# Altium PCB OSSI-1 OBC.PcbDoc (part 2 of 2)
Units mil, origin at the board's own origin, x right, y up, seen from the top; angles counter-clockwise.
Board outline 3701 x 3701 mil, 2 copper layers (Top, Bottom), stack 61.811 mil thick; 158 components, 161 nets, 616 pads, 177 vias.
Unrouted connection lines stored in the file: 1.
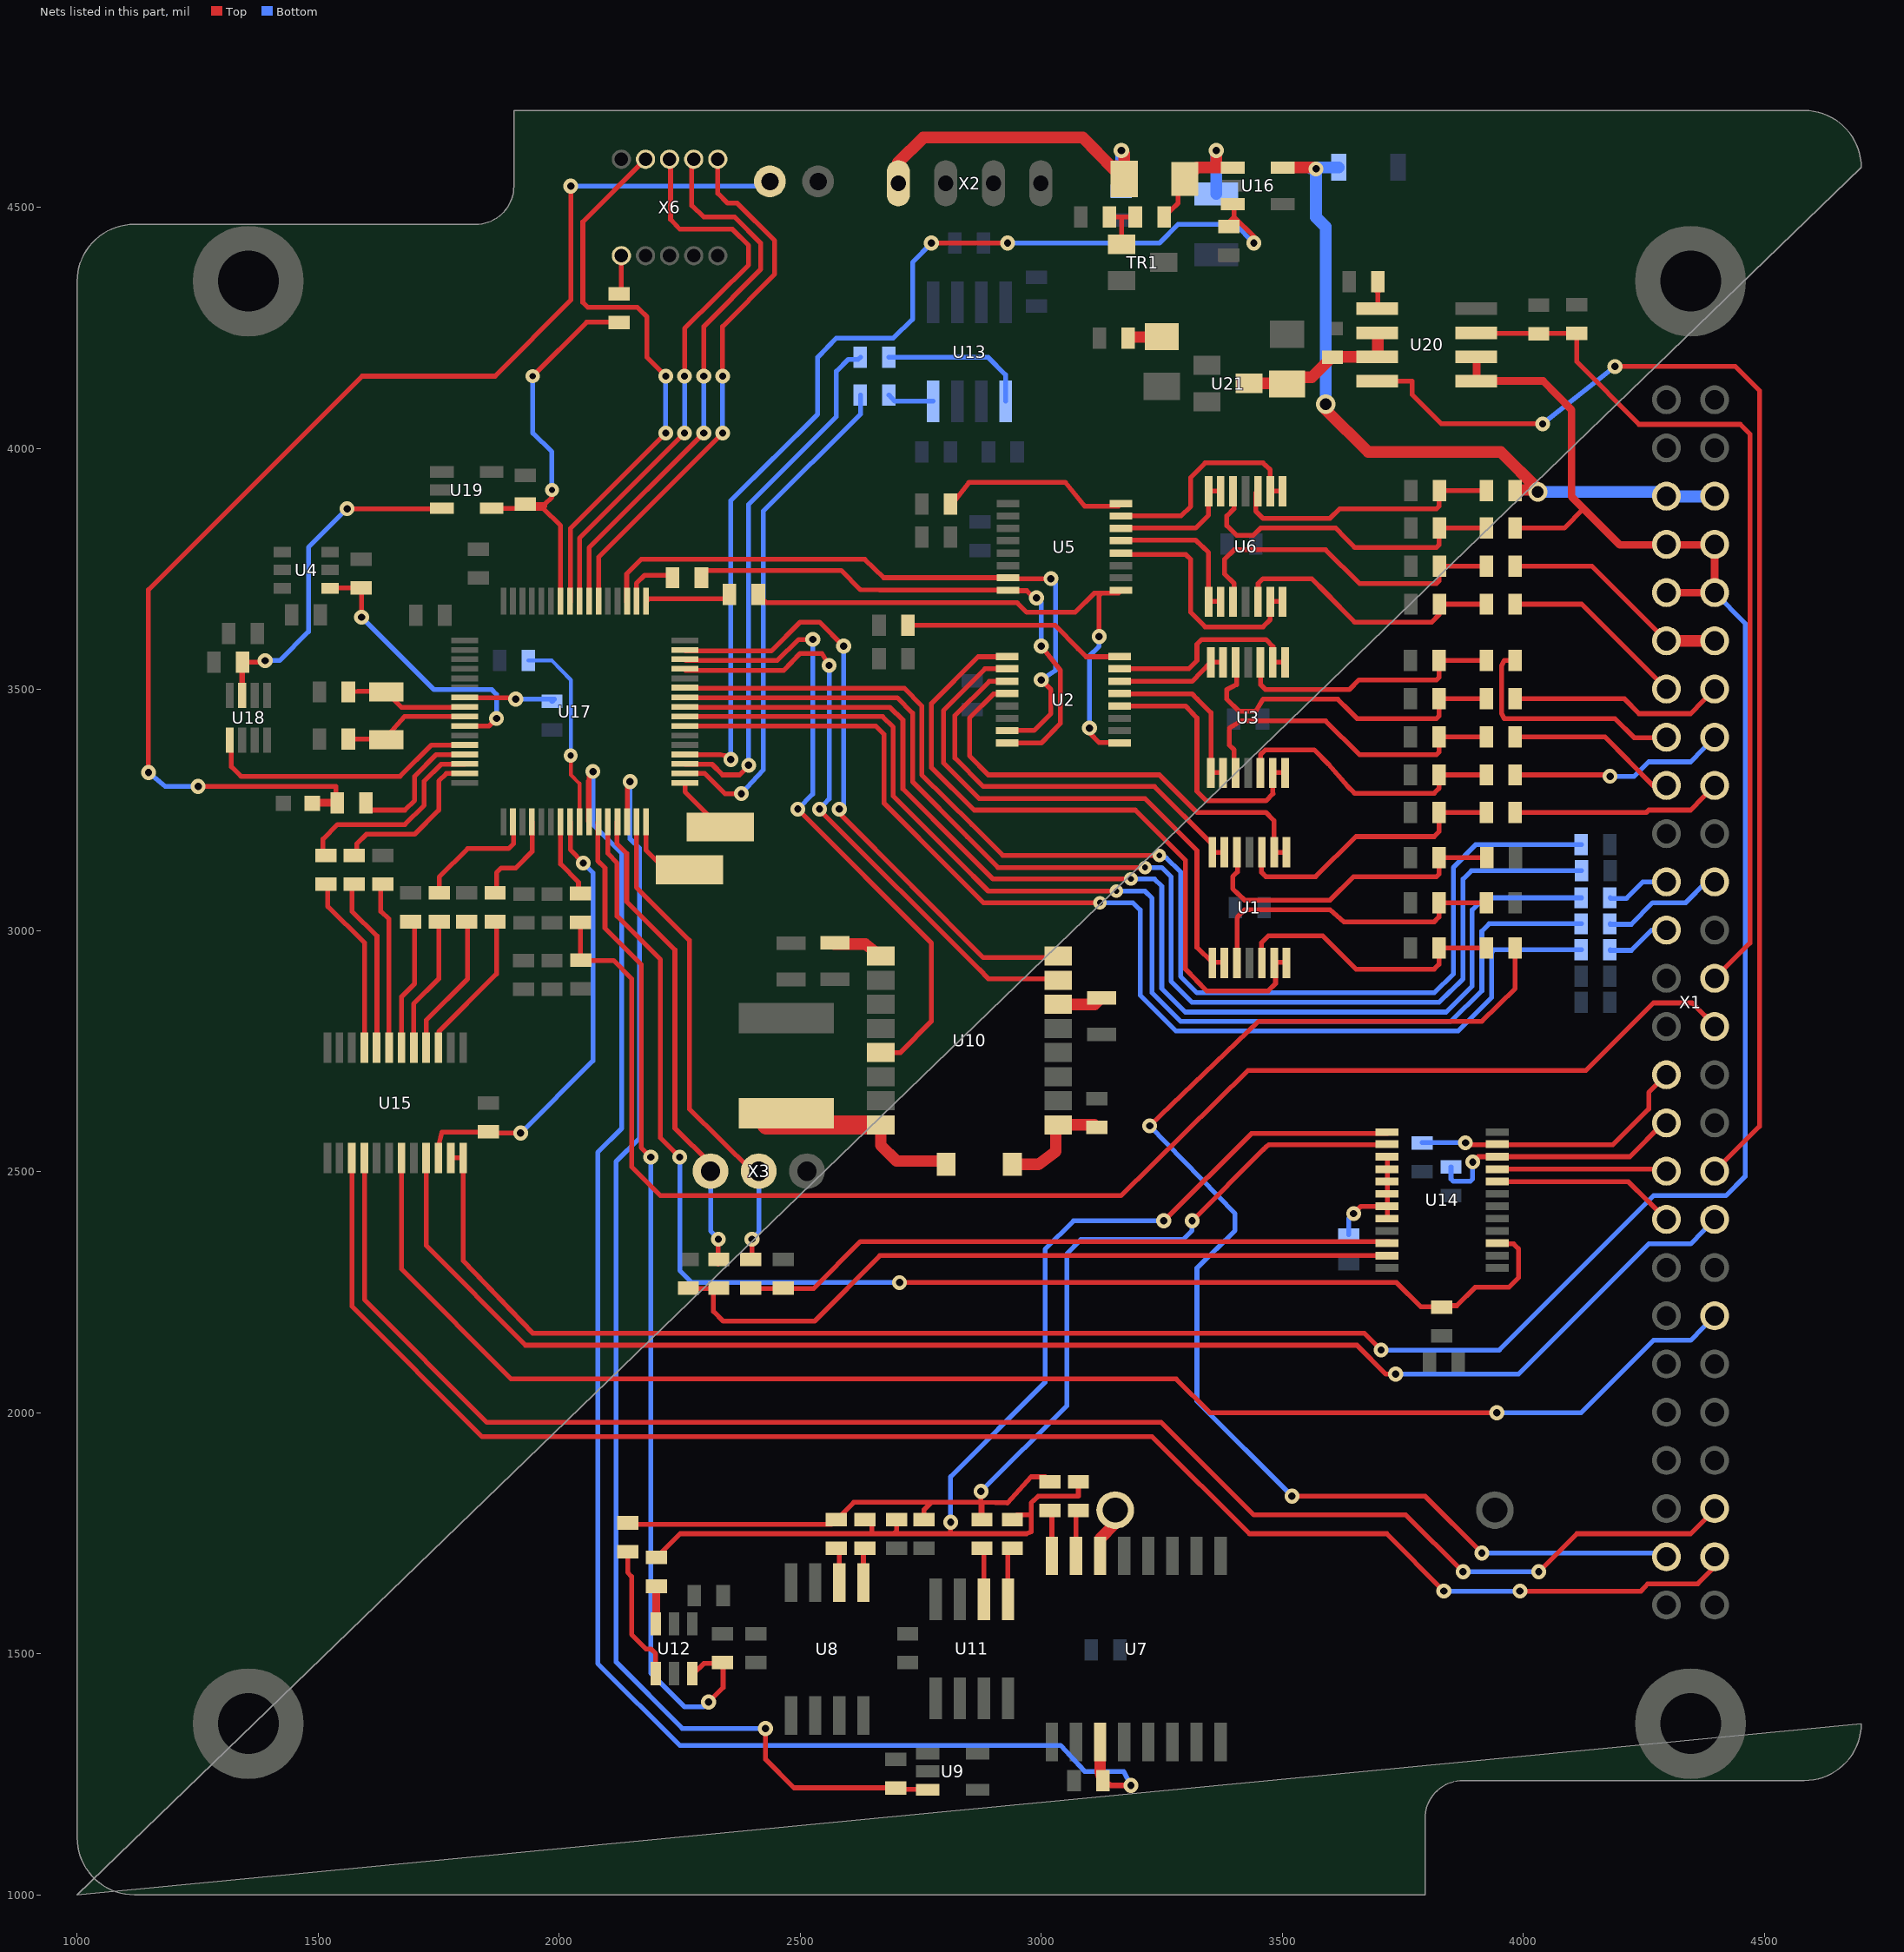
[diagram p2: the nets of this part, all layers, seen from the top]

## Via types
v1: diameter 31/31 (per signal layer), hole 15, Top to Bottom, 101 vias
v2: diameter 36/36 (per signal layer), hole 20, Top to Bottom, 59 vias
v3: diameter 28/28 (per signal layer), hole 12, Top to Bottom, 7 vias
v4: diameter 29/29 (per signal layer), hole 13, Top to Bottom, 6 vias
v5: diameter 40/40 (per signal layer), hole 24, Top to Bottom, 2 vias
v6: diameter 32/32 (per signal layer), hole 16, Top to Bottom, 2 vias

## Nets (pads, with @x,y where several pads share a name; then routed paths per layer and width w, separated by ;. In a path a pad name is that pad's centre, name@x,y a point inside that pad or via, vN(x,y) a via of type N, cw(c..) or ccw(c..) an arc to the next point about the centre after c; other vN are vias at no path point) (continued)
GYRO_SCLK: U10.16 U17.47 | length 1305.1
  Top w10: U17.47@2261,3582 2262,3580 2440,3580 2500,3640 2540,3640 v1(2590,3590) ; v1(2581,3252) 2581,3244 2880,2944 3032,2944 U10.16@3035,2947
  Bottom w10: v1(2581,3252) 2590,3262 v1(2590,3590)
GYRO_SI: U10.15 U17.45 | length 1277.7
  Top w10: U17.45@2261,3542 2262,3540 2466,3540 2500,3575 2545,3575 v1(2560,3550) ; v1(2540,3252) 2540,3250 2871,2920 2890,2900 3012,2900 3020,2897 U10.15@3035,2897
  Bottom w10: v1(2540,3252) 2560,3273 v1(2560,3550)
GYRO_SO: U10.5 U17.46 | length 1335.3
  Top w10: U17.46@2261,3562 2263,3560 2452,3560 2497,3604 2511,3604 v1(2526,3604) ; v1(2495,3252) 2772,2974 2772,2812 2708,2747 U10.5@2667,2747
  Bottom w10: v1(2495,3252) 2526,3283 v1(2526,3604)
I2C_-RST: R48.1 U14.3 U17.28 | length 2913.3
  Top w10: U17.28@2101,3225 2101,3160 2120,3140 2120,3030 2210,2940 2210,2570 v1(2250,2530) ; v1(2706,2270) 3737,2270 3787,2220 3829,2220 3831,2219 R48.1@3830,2222 ; R48.1@3820,2220 R48.1@3830,2222 ; U14.3@3947,2351 3950,2351 3950,2350 3980,2350 3990,2340 3990,2280 3970,2260 3900,2260 3862,2222 R48.1@3830,2222
  Bottom w10: v1(2250,2530) 2250,2295 2275,2270 2610,2270 2669,2270 2708,2270 v1(2706,2270)
I2C_SCL: R64.1 R67.1 U14.22 | length 1370.8
  Top w10: R64.1@2397,2258 2465,2258 2528,2258 2625,2355 3722,2355 U14.22@3718,2351
I2C_SCL_TP: R64.2 U17.31 X3.2 | length 1040.2
  Top w10: U17.31@2160,3225 2160,3090 2270,2980 2270,2630 2400,2501 X3.2@2414,2501 ; R64.2@2397,2317 2400,2311 v1(2400,2360)
  Bottom w10: v1(2400,2360) 2414,2374 X3.2@2414,2501
I2C_SDA: R63.1 R65.1 U14.23 | length 1573.9
  Top w10: R65.1@2268,2258 2279,2258 R63.1@2320,2258 ; R63.1@2331,2258 R63.1@2320,2258 ; U14.23@3718,2326 2702,2326 2665,2326 2530,2190 2340,2190 2320,2210 2320,2220 R63.1@2320,2258
I2C_SDA_TP: R63.2 U17.29 X3.1 | length 1014.1
  Top w10: U17.29@2121,3225 2120,3225 2120,3180 2140,3160 2140,3060 2240,2960 2240,2590 2314,2517 X3.1@2314,2501 ; v1(2330,2360) 2330,2308 R63.2@2331,2317
  Bottom w10: X3.1@2314,2501 2314,2377 v1(2330,2360)
IO_-OE: R62.1 U15.22 U17.24 | length 968.5
  Top w10: U15.22@1750,2529 1750,2530 1750,2555 1757,2582 1853,2582 1843,2588 1850,2580 v1(1920,2580) ; U17.24@2023,3225 2023,3168 v1(2050,3140)
  Bottom w10: v1(1920,2580) 2070,2730 2070,3120 v1(2050,3140)
LED_-FAULT: R44.1 R46.1 X1.28 | length 3054.4
  Top w10: R44.1@2044,3017 2044,2940 2045,2938 2113,2938 2150,2900 2150,2510 2210,2450 3165,2450 3429,2710 4130,2710 4270,2850 4350,2850 4400,2800 4397,2800 X1.28@4397,2801
LED_-FAULT_IN: R44.2 U17.23 | length 165.7
  Top w10: U17.23@2003,3225 2003,3138 2040,3100 2040,3080 R44.2@2044,3076
LED_OFF: R29.1 X1.23 | length 135.4
  Bottom w10: R29.1@4180,2960 4180,2959 4224,2959 4266,3001 X1.23@4297,3001
LED_OFF_OUT: R29.2 U17.39 | length 2433.6
  Top w10: U17.39@2261,3424 2652,3424 2657,3424 2674,3407 2674,3264 2821,3117 2880,3058 v3(3122,3058)
  Bottom w10: v3(3122,3058) 3186,3058 3190,3058 3205,3043 3205,2866 3279,2792 3865,2792 3934,2861 3934,2954 3939,2960 R29.2@4121,2960
LED_SCL: U14.9 X1.33 | length 351.7
  Top w10: U14.9@3947,2505 4293,2505 X1.33@4297,2501
LED_SDA: U14.8 X1.35 | length 382
  Top w10: U14.8@3947,2479 4218,2479 X1.35@4297,2401
MUX_A0: R73.2 U2.1 U5.1 | length 1159.5
  Top w10: R73.2@2413,3697 2430,3680 2950,3680 2970,3660 3070,3660 3110,3700 3126,3700 ; v1(3100,3420) 3100,3410 3120,3390 3162,3390 U2.1@3163,3389 ; v1(3120,3610) 3120,3695 3126,3700 ; U5.1@3165,3706 3160,3700 3126,3700
  Bottom w10: v1(3100,3420) 3100,3570 3120,3590 v1(3120,3610)
MUX_A1: R72.2 U2.16 U5.16 | length 1133.8
  Top w10: R72.2@2295,3732 2295,3737 2305,3747 2585,3747 2625,3707 2665,3706 2668,3706 U5.16@2931,3706 2932,3705 2970,3705 2985,3690 v1(2990,3690) ; U2.16@2929,3389 3000,3389 3040,3430 3040,3540 v1(3000,3590)
  Bottom w10: v1(2990,3690) 3000,3680 v1(3000,3590)
MUX_A2: U2.15 U5.15 U17.51 | length 1381.7
  Top w10: U17.51@2141,3682 2140,3682 2140,3740 2170,3770 2634,3770 2673,3732 U5.15@2931,3732 2933,3730 v1(3020,3730) ; U2.15@2929,3415 2985,3415 3020,3450 3020,3500 v1(3000,3520)
  Bottom w10: v1(3000,3520) 3030,3540 3030,3720 v1(3020,3730)
N$1: U17.12 U18.1 | length 575.6
  Top w10: U18.1@1316,3395 1320,3390 1320,3340 1340,3320 1670,3320 1735,3385 U17.12@1804,3385
N$2: R16.2 R17.1 U6.3 | length 572.2
  Top w10: U6.3@3449,3912 3445,3908 3445,3870 3460,3855 3599,3855 3619,3875 3820,3875 3825,3880 3825,3913 R17.1@3924,3913
N$3: U5.7 U6.1 U6.2 | length 465.2
  Top w10: U5.7@3165,3860 3166,3860 3290,3860 3310,3880 3310,3940 3340,3970 3460,3970 3475,3956 3475,3912 U6.1@3500,3912
N$4: R45.1 R47.2 TR1.1 | length 110.4
  Top w10: R45.1@3141,4480 3166,4480 ; TR1.1@3167,4424 3167,4479 3166,4480 ; R47.2@3195,4480 3166,4480
N$5: C32.1 Q1.1 U17.8 | length 256
  Top w10: C32.1@1562,3495 1583,3496 1641,3496 1673,3463 U17.8@1804,3463
N$6: C31.1 Q1.2 U17.9 | length 266.8
  Top w10: C31.1@1562,3397 1583,3397 1641,3397 1641,3400 1640,3400 1679,3444 U17.9@1804,3444
N$7: R19.2 U7.15 | length 100
  Top w10: U7.15@3072,1703 3072,1798 R19.2@3077,1798
N$8: U5.6 U6.6 U6.7 | length 268.4
  Top w10: U5.6@3165,3834 3167,3835 3320,3835 3347,3862 3347,3912 U6.6@3372,3912
N$9: U5.5 U6.8 U6.9 | length 318.7
  Top w10: U5.5@3165,3809 3167,3810 3320,3810 3347,3784 3347,3683 U6.9@3372,3683
N$10: R74.2 U20.5 | length 77.2
  Top w10: R74.2@3697,4346 3697,4324 3701,4327 3695,4327 3698,4330 U20.5@3698,4290
N$11: U5.4 U6.13 U6.14 | length 507
  Top w10: U5.4@3165,3783 3168,3780 3300,3780 3310,3770 3310,3660 3340,3630 3460,3630 3475,3645 3475,3683 U6.14@3500,3683
N$12: U2.7 U3.1 U3.2 | length 428.4
  Top w10: U2.7@3163,3543 3306,3543 3323,3560 3323,3594 3333,3604 3466,3604 3481,3589 3481,3557 3480,3557 U3.1@3506,3557
N$13: C33.1 U17.7 | length 194.3
  Top w10: U17.7@1804,3483 1908,3483 v1(1910,3480)
  Bottom w10: v1(1910,3480) 1990,3480 1986,3476 C33.1@1985,3476
N$14: R39.2 U13.1 | length 311.9
  Bottom w10: R39.2@2684,4189 2693,4189 2890,4189 2926,4153 U13.1@2926,4098
N$15: R21.2 U7.16 | length 96.4
  Top w10: R21.2@3018,1798 3022,1793 U7.16@3022,1703
N$16: R54.1 U14.15 U14.16 U14.17 U14.18 U14.19 U14.20 | length 252.4
  Top w10: v1(3648,2413) 3663,2428 U14.19@3718,2428 ; U14.20@3718,2403 U14.19@3718,2428 ; U14.15@3718,2531 3718,2505 3718,2479 3718,2454 U14.19@3718,2428
  Bottom w10: R54.1@3638,2369 3638,2403 v1(3648,2413)
N$17: U17.57 X6.7 | length 1185.4
  Top w10: U17.57@2023,3682 2023,3834 v1(2221,4032) ; X6.7@2179,4600 2049,4470 2049,4303 2059,4293 2162,4293 2167,4288 2182,4273 2182,4189 v1(2221,4150)
  Bottom w10: v1(2221,4032) v1(2221,4150)
N$18: U17.56 X6.5 | length 1195.6
  Top w10: U17.56@2042,3682 2042,3814 v1(2260,4032) ; X6.5@2229,4600 2231,4599 2231,4475 2250,4455 2359,4455 2393,4421 2393,4381 2260,4249 v1(2260,4150)
  Bottom w10: v1(2260,4032) v1(2260,4150)
N$19: U17.55 X6.3 | length 1163.8
  Top w10: U17.55@2062,3682 2062,3794 v1(2300,4032) ; X6.3@2279,4600 2275,4596 2275,4504 2300,4480 2364,4480 2418,4426 2418,4372 2300,4253 v1(2300,4150)
  Bottom w10: v1(2300,4032) v1(2300,4150)
N$20: U17.54 X6.1 | length 1129.5
  Top w10: U17.54@2082,3682 2082,3775 v1(2339,4032) ; X6.1@2329,4600 2329,4529 2349,4509 2369,4509 2447,4431 2447,4362 2339,4253 v1(2339,4150)
  Bottom w10: v1(2339,4032) v1(2339,4150)
N$21: U2.6 U3.6 U3.7 | length 231.9
  Top w10: U2.6@3163,3517 3313,3517 3352,3557 U3.6@3378,3557
N$22: R36.2 U13.4 | length 97.7
  Bottom w10: R36.2@2684,4111 2696,4098 U13.4@2776,4098
N$23: R71.1 X6.10 | length 87.4
  Top w10: R71.1@2120,4320 R71.1@2121,4321 ; R71.1@2124,4321 R71.1@2121,4321 ; X6.10@2129,4400 2129,4332 2130,4330 R71.1@2121,4321
N$24: R14.2 R15.1 U6.5 | length 706.3
  Top w10: U6.5@3398,3912 3400,3909 3400,3875 3385,3860 3385,3840 3405,3820 3440,3820 3455,3835 3530,3835 3520,3835 3611,3835 3630,3815 3650,3795 3820,3795 3825,3800 3825,3835 R15.1@3924,3835
N$25: R12.2 R13.1 U6.10 | length 710.2
  Top w10: U6.10@3398,3683 3400,3686 3400,3720 3380,3740 3380,3770 3400,3790 3590,3790 3660,3720 3820,3720 3825,3725 3825,3756 R13.1@3924,3756
N$26: R10.2 R11.1 U6.12 | length 581.3
  Top w10: U6.12@3449,3683 3450,3684 3450,3720 3460,3730 3561,3730 3591,3700 3630,3660 3650,3640 3810,3640 3825,3655 3825,3677 R11.1@3924,3677
N$27: R18.2 U5.8 | length 401.1
  Top w10: R18.2@2812,3885 2815,3885 2850,3930 3050,3930 3090,3880 3160,3880 U5.8@3165,3885
N$28: U2.5 U3.8 U3.9 | length 355.2
  Top w10: U2.5@3163,3491 3313,3491 3323,3481 3352,3452 3352,3328 U3.9@3378,3328
N$29: R9.2 U2.8 | length 467.2
  Top w10: R9.2@2723,3633 3029,3633 3077,3584 3093,3568 U2.8@3163,3568
N$30: U2.4 U3.13 U3.14 | length 566.2
  Top w10: U2.4@3163,3466 3299,3466 3323,3441 3323,3289 3343,3269 3466,3269 3481,3284 3480,3284 3480,3328 U3.14@3506,3328
N$31: U1.1 U1.2 U2.12 | length 955.9
  Top w10: U2.12@2929,3491 2901,3491 2851,3441 2851,3363 2890,3323 3245,3323 3323,3245 3441,3245 3466,3245 3481,3230 3483,3228 3483,3162 U1.1@3508,3162
N$32: R68.2 U17.13 | length 290.2
  Top w10: R68.2@1599,3265 1599,3262 1610,3250 1680,3250 1700,3270 1700,3320 1745,3365 U17.13@1804,3365
N$33: C23.1 U10.1 | length 108.8
  Top w24: C23.1@2572,2974 2572,2973 2570,2972 2620,2972 2635,2972 U10.1@2667,2947
N$34: R24.2 U8.5 | length 71.5
  Top w10: U8.5@2631,1648 2631,1711 R24.2@2634,1719
N$35: R25.2 U8.6 | length 78.4
  Top w10: R25.2@2575,1719 2579,1719 2580,1720 2581,1720 U8.6@2581,1648
N$36: R30.2 U11.5 | length 110.7
  Top w10: U11.5@2931,1612 2931,1710 R30.2@2940,1719
N$37: R70.2 U17.43 | length 2589
  Top w10: U17.43@2261,3503 2716,3503 2752,3466 2752,3323 2856,3220 2920,3156 v3(3245,3156)
  Bottom w10: v3(3245,3156) 3250,3151 3259,3151 3289,3122 3289,2905 3323,2871 3815,2871 3855,2910 3855,3131 3901,3178 R70.2@4121,3178
N$38: R69.2 U17.42 | length 2566.4
  Top w10: U17.42@2261,3483 2701,3483 2733,3451 2733,3309 2846,3195 2910,3131 v3(3215,3131)
  Bottom w10: v3(3215,3131) 3240,3131 3250,3131 3269,3112 3269,2895 3313,2851 3825,2851 3875,2900 3875,3107 3892,3124 R69.2@4121,3124
N$39: R31.2 U11.6 | length 108.4
  Top w10: R31.2@2877,1719 2881,1714 U11.6@2881,1612
N$40: R38.2 U12.6 | length 80.4
  Top w16: U12.6@2201,1561 2201,1640 R38.2@2202,1641
N$41: R41.2 U12.1 | length 284.6
  Top w10: R41.2@2142,1713 2142,1669 2150,1660 2150,1540 2180,1510 2190,1510 2200,1500 2200,1460 2201,1460 U12.1@2201,1459
N$42: R66.2 U17.25 | length 407.3
  Top w8: v4(2024,3363) 2024,3323 2042,3305 U17.25@2042,3225
  Bottom w8: R66.2@1936,3560 1985,3560 2024,3520 v4(2024,3363)
N$43: C27.1 F1.1 X2.1 | length 750.6
  Top w16: F1.1@3155,4585 3157,4583 3166,4583 F1.1@3182,4583
  Top w24: F1.1@3166,4583 3172,4589 v6@3172,4612 ; v6(3166,4618) v6@3172,4612 ; F1.1@3172.01,4559 v6@3172,4612
  Top w25: X2.1@2703,4550 2703,4593 2755,4645 3086,4645 3150,4580 F1.1@3155,4585
  Bottom w24: C27.1@3166,4534 v6(3166,4618)
N$44: U1.8 U1.9 U2.10 | length 1148.3
  Top w10: U2.10@2929,3542.98 2883,3543 2797,3456 2797,3348 2871,3274 3215,3274 3323,3166 3323,2965 3355,2934 U1.9@3380,2934
N$45: U1.13 U1.14 U2.9 | length 1444.8
  Top w10: U2.9@2929,3568 2869,3568 2772,3471 2772,3338 2861,3250 3195,3250 3299,3146 3299,2920 3343,2875 3471,2875 3486,2890 3486,2931 3483,2934 U1.14@3508,2934
N$46: C22.1 U10.14 | length 95.8
  Top w24: U10.14@3035,2847 3111,2847 C22.1@3125,2861
N$47: C1.1 R1.1 U1.12 | length 580.5
  Top w10: U1.12@3457,2934 3457,2975 3461,2979 3471,2989 3584,2989 3653,2920 3815,2920 3825,2930 3825,2964 R1.1@3924,2964
N$48: C2.1 R2.1 U1.10 | length 660.8
  Top w10: U1.10@3406,2934 3406,3024 3407,3028 3422,3043 3599,3043 3628,3018 3815,3018 3825,3028 3825,3058 R2.1@3924,3058
N$49: R53.1 U15.6 | length 275.5
  Top w10: U15.6@1673,2757 1673,2863 1700,2890 1700,3010 R53.1@1692,3018
N$50: R52.1 U15.7 | length 349.3
  Top w10: R52.1@1634,3097 1630,3094 1630,3040 1647,3024 U15.7@1647,2757
N$51: C10.1 R8.1 U3.3 | length 565.5
  Top w10: U3.3@3455,3557 3455,3556 3455,3510 3465,3500 3639,3500 3659,3520 3820,3520 3825,3525 3825,3560 R8.1@3924,3560
N$52: C8.1 R7.1 U3.5 | length 707.7
  Top w10: U3.5@3404,3557 3405,3555 3405,3510 3385,3500 3385,3480 3410,3455 3445,3455 3460,3480 3535,3480 3615,3480 3640,3455 3655,3440 3820,3440 3825,3445 3825,3481 R7.1@3924,3481
N$53: C7.1 R6.1 U3.10 | length 699.4
  Top w10: U3.10@3404,3328 3400,3331 3400,3375 3390,3385 3390,3420 3415,3435 3590,3435 3660,3365 3820,3365 3825,3370 3825,3402 R6.1@3924,3402
N$54: C6.1 R5.1 U3.12 | length 581.5
  Top w10: U3.12@3455,3328 3455,3329 3455,3365 3465,3375 3566,3375 3596,3345 3635,3300 3650,3285 3815,3285 3825,3295 3825,3323 R5.1@3924,3323
N$55: C3.1 R3.1 U1.3 | length 590
  Top w10: U1.3@3457,3162 3457,3121 3461,3117 3466,3112 3569,3112 3653,3195 3815,3195 3825,3205 3825,3245 R3.1@3924,3245
N$56: R51.1 U15.8 | length 364.2
  Top w10: R51.1@1575,3097 1570,3093 1570,3040 1622,2989 U15.8@1622,2757
N$57: R50.1 U15.9 | length 373.4
  Top w10: R50.1@1516,3097 1520,3093 1520,3050 1596,2975 U15.9@1596,2757
N$58: C5.1 R4.1 U1.5 | length 672.6
  Top w10: U1.5@3406,3162 3407,3161 3407,3122 3397,3112 3397,3087 3422,3063 3599,3063 3648,3112 3820,3112 3825,3117 3825,3151 3826,3151 R4.1@3924,3151
N$59: C41.2 R75.1 | length 69.8
  Top w24: R75.1@3181,4229 3183,4231 C41.2@3250,4231
N$60: U17.33 X5.1 | length 121.2
  Top w10: U17.33@2261,3306 2261,3288 X5.1@2334,3215
N$61: U17.32 X4.1 | length 165
  Top w10: U17.32@2180,3225 2180,3167 2221,3126 2260,3126 X4.1@2270,3126
N$62: R73.1 U17.49 | length 189.9
  Top w10: U17.49@2180,3682 2186,3688 2349,3688 2359,3697 R73.1@2354,3697
N$63: 
N$64: R72.1 U17.50 | length 123.1
  Top w10: U17.50@2160,3682 2160,3720 2177,3737 2231,3737 R72.1@2236,3732
N$65: BAT1.P U7.14 | length 107.3
  Top w24: U7.14@3122,1703 3122,1739 3151,1768 3151,1791 BAT1.P@3153,1798
N$70: R55.1 U15.5 | length 283.5
  Top w10: U15.5@1698,2757 1698,2848 1750,2900 1750,3018 R55.1@1751,3018
N$71: R56.1 U15.4 | length 297.5
  Top w10: U15.4@1724,2757 1724,2814 1810,2900 1810,3016 R56.1@1808,3018
N$72: R57.1 U15.3 | length 316.5
  Top w10: U15.3@1750,2757 1750,2790 1870,2910 1870,3020 1869,3020 R57.1@1867,3018
N$82: D1.A L1.P$2 U10.8 | length 608.7
  Top w24: U10.8@2667,2597 2667,2555 2700,2522 2795,2522 D1.A@2802,2515
  Top w32: L1.P$2@2430,2632 2520,2632 2510,2622 L1.P$2@2471,2622
  Top w40: L1.P$2@2430,2632 2430,2597 U10.8@2667,2597
N$90: C21.2 D1.C U10.9 | length 239.5
  Top w24: D1.C@2939,2515 2994,2515 3030,2542 3030,2593 U10.9@3035,2597 3110,2597 C21.2@3115,2592
N$666: C39.1 C40.1 U20.6 U20.7 U21.3 | length 352.5
  Top w24: U21.3@3431,4135 3484,4135 3496,4148 3510,4133 3525,4148 3561,4148 3604,4190 3698,4190 U20.6@3698,4240
OBC_-FAULT: U20.8 X1.34 | length 2565
  Top w10: U20.8@3698,4140 3769,4140 3769,4112 3830,4051 v1(4040,4051) ; v1(4190,4170) 4440,4170 4490,4120 4490,2594 X1.34@4397,2501
  Bottom w10: v1(4040,4051) 4189,4169 v1(4190,4170)
OBC_I2C_OFF: R27.1 U9.P$3 U17.30 | length 2735.2
  Top w10: U17.30@2141,3225 2141,3302 v1(2147,3309) ; v1(2428,1345) 2428,1281 2487,1222 2698,1222 2701,1219 U9.P$3@2765,1219
  Bottom w10: v1(2147,3309) 2147,3190 2167,3171 2167,2570 2118,2521 2118,1483 2255,1345 v1(2428,1345)
OBC_OFF: C38.1 R76.2 U20.3 X1.26 | length 1847.9
  Top w10: U20.3@3903,4240 3905,4239 4032,4239 4111,4239 4111,4180 4240,4050 4450,4050 4470,4030 4470,2974 X1.26@4397,2901
OBC_SCL: R21.1 R25.1 R31.1 R41.1 R58.1 U14.14 | length 2400.8
  Top w10: R41.1@2142,1772 2144,1768 2565,1768 2575,1778 2611,1814 2772,1814 ; R58.1@2757,1778 2757,1799 2772,1814 ; v1(2875,1837) 2875,1779 2877,1778 2877,1814 ; R21.1@3018,1857 3008,1867 2979,1867 2930,1813 2877,1814 ; v1(3313,2398) 3461,2546 3466,2551 3472,2556 U14.14@3718,2556 ; 2772,1814 2877,1814
  Bottom w10: v1(2875,1837) 3053,2014 3053,2329 3082,2359 3294,2359 3313,2378 v1(3313,2398)
OBC_SDA: R19.1 R24.1 R30.1 R38.1 R61.1 U14.13 | length 2590.9
  Top w10: R38.1@2202,1700 2251,1749 2649,1749 ; R24.1@2634,1778 2649,1768 2649,1749 ; R61.1@2700,1778 2700,1755 2693,1749 ; v1(2812,1773) 2812,1749 ; R30.1@2940,1778 2950,1788 2979,1788 ; R19.1@3077,1857 3077,1828 3077,1827 2994,1827 2979,1813 2979,1788 ; v1(3254,2398) 3436,2579 3718,2579 3718,2582 U14.13@3716,2579 ; 2649,1749 2654,1749 2693,1749 ; 2693,1749 2812,1749 ; 2812,1749 2969,1749 2979,1753 2979,1788
  Bottom w10: v1(2812,1773) 2812,1867 3008,2063 3008,2339 3067,2398 v1(3254,2398)
OBC_WT_RST: C35.1 U18.7 U19.3 | length 717.9
  Top w10: C35.1@1344,3557 1387,3557 v1(1390,3560) ; v1(1560,3875) 1756,3875 U19.3@1757,3876
  Top w12: U18.7@1342,3488 1342,3556 C35.1@1344,3557
  Bottom w10: v1(1390,3560) 1420,3560 1480,3620 1480,3795 v1(1560,3875)
PANELTEMP_SCL: R59.1 U14.11 X1.29 | length 588.4
  Top w10: v1(3880,2560) 3885,2556 3947,2556 4186,2556 4260,2630 4260,2664 X1.29@4297,2701
  Bottom w10: R59.1@3790,2560 3791,2560 v1(3880,2560)
PANELTEMP_SDA: R60.1 U14.10 X1.31 | length 551.3
  Top w10: v1(3895,2520) 3906,2531 3947,2531 4221,2531 4290,2600 4300,2600 4300,2601 X1.31@4297,2601
  Bottom w10: R60.1@3850,2510 3850,2485 3855,2480 3890,2480 3895,2485 v1(3895,2520)
RESETOBC: R71.2 R77.1 U17.58 U19.4 | length 938
  Top w10: U19.4@1859,3876 1966,3876 ; v4(1945,4150) 2057,4262 R71.2@2124,4262 ; v4(1985,3914) 1985,3899 1970,3884 ; U17.58@2003,3682 2003,3840 1966,3876 ; 1966,3876 1970,3880 ; 1970,3880 1970,3884 ; 1970,3880 1970,3881 1930,3884 1970,3884 ; 1970,3884 1965,3879 1966,3884 1970,3884
  Bottom w10: v4(1945,4150) 1945,4032 1985,3993 v4(1985,3914)
RTC_-INT: R20.1 U7.3 U17.26 | length 3449.6
  Top w10: 2060,3310 2060,3227 2062,3225 2062,3322 v1(2070,3330) ; v1@3181,1227 v1(3186,1227)
  Top w12: R20.1@3127,1237 3145,1227 v1@3181,1227
  Top w24: U7.3@3122,1317 3122,1256 R20.1@3127,1237
  Bottom w10: v1(2070,3330) 2070,3220 2130,3160 2130,2590 2080,2540 2080,1480 2250,1310 3040,1310 3090,1256 3171,1256 v1(3186,1227)
RXD1: R39.1 U17.35 | length 1103.8
  Top w10: U17.35@2261,3345 2317,3345 2339,3323 2374,3323 v1(2393,3343)
  Bottom w10: v1(2393,3343) 2393,3884 2575,4066 2575,4160 2600,4185 2620,4185 R39.1@2625,4189
SC_-ON: U15.19 X1.40 | length 3162.3
  Top w10: U15.19@1673,2529 1673,2298 1900,2070 3280,2070 3350,2000 v1(3945,2000)
  Bottom w10: v1(3945,2000) 4120,2000 4270,2150 4347,2150 X1.40@4397,2201
SC_-ON_IN: R55.2 U17.18 | length 262
  Top w10: R55.2@1751,3077 1751,3111 1810,3170 1895,3170 1905,3180 1905,3224 U17.18@1904,3225
SC_-PFO: U15.16 X1.48 | length 3384.5
  Top w10: U15.16@1596,2529 1596,2235 1850,1980 3240,1980 3249,1980 3441,1788 3756,1788 v1(3875,1670) ; v1(4032,1670) 4111,1749 4347,1749 4386,1788 4386,1790 X1.48@4397,1801
  Bottom w10: v1(3875,1670) 3953,1670 v1(4032,1670)
SC_-PFO_IN: R51.2 U17.15 | length 345.4
  Top w10: R51.2@1575,3156 1580,3162 1580,3180 1600,3200 1700,3200 1750,3250 1750,3310 1766,3326 U17.15@1804,3326
SCCHG_EN: R23.1 X1.21 | length 131.5
  Bottom w10: R23.1@4180,3068 4181,3067 4214,3067 4248,3101 X1.21@4297,3101
SCCHG_EN_OUT: R23.2 U17.41 | length 2519.9
  Top w10: U17.41@2261,3463 2686,3463 2713,3437 2713,3294 2836,3171 2900,3107 v3(3186,3107)
  Bottom w10: v3(3186,3107) 3235,3107 3250,3092 3250,2890 3250,2880 3299,2831 3840,2831 3894,2885 3894,3043 3920,3068 R23.2@4121,3068
SCOUT_-PG: U15.15 X1.50 | length 3421.8
  Top w10: U15.15@1570,2529 1570,2221 1840,1950 3230,1950 3432,1749 3717,1749 v1(3835,1630) ; v1(3993,1630) 4244,1630 4258,1645 4362,1645 4396,1680 4396,1699 4397,1700 X1.50@4397,1701
  Bottom w10: v1(3835,1630) 3953,1630 v1(3993,1630)
SCOUT_-PG_IN: R50.2 U17.14 | length 424
  Top w10: R50.2@1516,3156 1510,3162 1510,3190 1540,3220 1680,3220 1720,3260 1720,3310 1755,3345 U17.14@1804,3345
SCOUT_EN: R22.1 X1.22 | length 254.7
  Bottom w10: R22.1@4180,3014 4180,3013 4224,3013 4268,3058 4337,3058 4380,3101 X1.22@4397,3101
SCOUT_EN_OUT: R22.2 U17.40 | length 2476.4
  Top w10: U17.40@2261,3444 2671,3444 2693,3422 2693,3279 2826,3146 2890,3082 v3(3156,3082)
  Bottom w10: v3(3156,3082) 3215,3082 3230,3067 3230,2871 3289,2812 3850,2812 3914,2875 3914,2999 3929,3014 R22.2@4121,3014
SOLAR_-ON: U15.21 X1.36 | length 3099.1
  Top w10: U15.21@1724,2529 1724,2347 1930,2140 3655,2140 3715,2080 v1(3735,2080)
  Bottom w10: v1(3735,2080) 3990,2080 4260,2350 4347,2350 X1.36@4397,2401
SOLAR_-ON_IN: R57.2 U17.20 | length 197.2
  Top w10: R57.2@1867,3077 1870,3081 1870,3120 1880,3130 1910,3130 1944,3164 U17.20@1944,3225
SOLAR_CS1: R8.2 X1.15 | length 499.9
  Top w10: R8.2@3983,3560 3960,3560 3955,3550 3955,3450 3960,3440 4190,3440 4230,3400 4297,3400 X1.15@4297,3401
SOLAR_CS2: R7.2 X1.14 | length 448.6
  Top w10: R7.2@3983,3481 4210,3481 4240,3450 4347,3450 X1.14@4397,3501
SOLAR_CS3: R6.2 X1.17 | length 360.5
  Top w10: R6.2@3983,3402 4169,3402 4270,3300 X1.17@4297,3300 ; X1.17@4297,3301 X1.17@4297,3300 ; X1.17@4300,3300 X1.17@4297,3300
SOLAR_CS4: R5.2 X1.16 | length 449.5
  Top w10: R5.2@3983,3323 4178,3323 v1(4180,3320)
  Bottom w10: v1(4180,3320) 4230,3320 4260,3350 4347,3350 X1.16@4397,3401
SOLAR_CS5: R3.2 X1.18 | length 709.5
  Top w10: X1.18@4397,3301 4347,3250 4260,3250 4255,3245 ; 4255,3245 R3.2@3983,3245 4255,3245
STATUS_LED: JP1.2 LED1.A R68.1 | length 2646.8
  Top w10: v1(1148,3328) 1148,3707 1591,4150 1867,4150 2024,4308 v1(2024,4544) ; v1(1251,3299) 1537,3299 1537,3265 R68.1@1540,3265
  Top w16: LED1.A@1488,3264 1488,3265 R68.1@1540,3265
  Bottom w10: v1(1148,3328) 1183,3299 v1(1251,3299) ; v1(2024,4544) 2063,4544 2339,4544 2418,4544 2428,4554 JP1.2@2437,4554
SUN_IN: U1.6 U1.7 U2.11 | length 875.6
  Top w10: U2.11@2929,3517 2892,3517 2821,3446 2821,3358 2880,3299 3235,3299 3353,3181 3353,3164 3355,3162 U1.6@3380,3162
SUPERCAP_TEMP: R1.2 X1.49 | length 2740.9
  Top w10: v1(3225,2595) 3451,2812 3914,2812 3983,2880 R1.2@3983,2964 ; v1(3520,1827) 3796,1827 v1(3914,1709)
  Bottom w10: v1(3225,2595) 3402,2413 3402,2378 3323,2300 3323,2024 v1(3520,1827) ; v1(3914,1709) 4289,1709 X1.49@4297,1701
TEMP_-ALERT: R33.2 U12.3 U17.27 | length 2133.9
  Top w10: U17.27@2082,3225 2080,3224 2080,3145 2095,3130 2095,3005 2170,2930 2170,2550 v1(2190,2530) ; U12.3@2276,1459 2279,1459 2300,1480 2337,1480 2339,1483 2340,1481 2340,1430 v1(2310,1400)
  Bottom w10: v1(2190,2530) 2190,1460 2260,1390 2300,1390 v1(2310,1400)
TXD1: R36.1 U17.34 | length 1062.9
  Top w10: U17.34@2261,3326.05 2302,3326 2344,3284 v1(2378,3284)
  Bottom w10: v1(2378,3284) 2423,3333 2423,3870 2625,4071 R36.1@2625,4111
VBAT: R13.2 X1.11 X1.12 | length 478.2
  Top w10: R13.2@3983,3756 4142,3756 X1.11@4297,3601
  Top w24: X1.11@4297,3601 X1.12@4397,3601
VBUS: R15.2 U15.23 U15.24 U20.1 U20.2 X1.7 X1.8 X1.9 X1.10 | length 5513.5
  Top w10: U15.23@1775,2529 1801,2529 1801,2315 1945,2165 3670,2165 v1(3705,2130) ; R15.2@3983,3835 4085,3835 4125,3875
  Top w16: U20.2@3903,4190 3903,4140 4041,4140 4100,4080 4100,3900 4125,3875 4200,3800 X1.7@4297,3800 ; X1.9@4297,3701 X1.10@4397,3701 X1.8@4397,3800 ; X1.7@4297,3801 X1.7@4297,3800 ; X1.8@4397,3801 X1.8@4397,3800 ; X1.7@4297,3800 X1.8@4397,3800
  Bottom w10: v1(3705,2130) 3950,2130 4270,2450 4420,2450 4460,2490 4460,3637 X1.10@4397,3701
VEXT: C30.P$1 F1.2 R47.1 U16.P$1 | length 351.7
  Top w10: R47.1@3254,4480 3284,4509 F1.2@3284,4544
  Top w24: F1.2@3298,4559 3298,4558 3284,4544 3323,4583 3363,4583 ; v6(3363,4618) 3363,4583 ; U16.P$1@3397,4583 3363,4583
  Bottom w24: C30.P$1@3363,4527.99 v6(3363,4618)
VEXT_OFF: R49.1 U16.P$3 U17.36 | length 2248.6
  Top w10: U17.36@2261,3365 2334,3365 2344,3363 v1(2356,3355) v1@2364,3353 ; v1(2772,4426) v1(2930,4426) ; R49.1@3389,4461 3384,4464 3400,4480 ; U16.P$3@3397,4508 3400,4505 3400,4480 ; v1(3441,4426) 3441,4440 3400,4480
  Bottom w10: v1(2356,3355) 2356,3892 2536,4071 2536,4150 2536,4189 2575,4229 2693,4229 2733,4268 2733,4308 2733,4386 v1(2772,4426) ; v1(2930,4426) 3245,4426 3284,4465 3402,4465 v1(3441,4426)
VREF_EXT: C13.2 U4.4 U17.10 | length 595.3
  Top w10: U4.4@1524,3711 1525,3711 C13.2@1589,3711 1590,3710 v1(1590,3650) ; U17.10@1804,3424 1854,3424 v1(1870,3440)
  Bottom w10: v1(1590,3650) 1740,3500 1860,3500 1870,3490 v1(1870,3440)
VSOLAR: C29.P$1 R17.2 U16.P$5 X1.5 X1.6 | length 1729.7
  Top w10: R17.2@3983,3913 4008,3913 v5(4030,3910)
  Top w24: v5(3590,4092) 3590,4080 3678,3993 3953,3993 4032,3914 3983,3914 R17.2@3983,3913
  Top w25: U16.P$5@3500,4583 3568,4583 v1(3570,4580)
  Bottom w24: v1(3570,4580) 3560,4580 3560,4583 C29.P$1@3616.98,4583
  Bottom w25: v1(3570,4580) 3570,4480 3590,4460 v5(3590,4092) ; v5(4030,3910) 4290,3910 4300,3900 4397,3900 X1.6@4397,3901 X1.5@4297,3901
VSUPERCAP: R11.2 X1.13 | length 386.9
  Top w10: R11.2@3983,3677 4121,3677 X1.13@4297,3501
pads on no net: H1.B3,2 H2.B3,2 H3.B3,2 H4.B3,2 U4.1 U4.5 U4.6 U7.1 U7.4 U9.P$4 U15.10 U16.P$4 U17.2 U17.3 U17.4 U17.5 U17.6 U17.52 U17.61 U18.3 X1.3 X1.4 X6.2 X6.6 X6.8

## Polygon pours and split planes (outlines as drawn)
GND on Bottom "Bottom-GND" (solid, remove dead copper, pour order 2): 1901,4706 1901,4470 995,4470 995,4426 995,995 3801,995 3801,1232 4706,1232 4706,4706
GND on Top "Top-GND" (solid, remove dead copper, pour order 4): 3165,2807 2797.93,2807 2705,2714.07 2705,2597 2995,2597 2995,2637 3165,2637
GND on Top "Top-GND 1" (solid, remove dead copper, pour order 6): 2447.5,3044.5 2512.5,3044.5 2512.5,2954.5 2602.5,2954.5 2602.5,2914.5 2692.5,2914.5 2692.5,2829.5 2627.5,2829.5 2627.5,2869.5 2527.5,2869.5 2527.5,2909.5 2447.5,2909.5
GND on Top "Top-GND 2" (solid, remove dead copper, pour order 8): 3782.5,2932.5 3782.5,3952.5 3667.5,3952.5 3667.5,2932.5
GND on Top "Top-GND 3" (solid, remove dead copper, pour order 10): 2907.5,3892.5 3061.04,3892.5 3081.04,3872.5 3132.5,3872.5 3132.5,3762.5 3187.5,3762.5 3187.5,3752.5 3132.5,3752.5 3132.5,3707.5 3047.5,3707.5 3047.5,3752.5 2907.5,3752.5 2907.5,3762.5 2967.5,3762.5 2967.5,3797.5 2907.5,3797.5
GND on Top "Top-GND 4" (solid, remove dead copper, pour order 12): 3970,2577.5 3757.5,2577.5 3757.5,2652.5 4002.5,2652.5 4002.5,2577.5
GND on Top "Top-GND 5" (solid, remove dead copper, pour order 14): 2066.5,1912.5 3221.04,1912.5 3432.5,1701.04 3432.5,1268.96 3391.04,1227.5 2297.96,1227.5 2066.5,1458.96
GND on Top "Top-GND 6" (solid, remove dead copper, pour order 16): 2306,2767 2306,2667 2349,2667 2349,2767
GND on Top "Top-GND 7" (solid, remove dead copper, pour order 18): 1247.5,3337.5 1247.5,3652.5 1330.95,3652.5 1420.95,3572.5 1532.5,3572.5 1532.5,3337.5
GND on Top "Top-GND 8" (solid, remove dead copper, pour order 20): 1337.5,3761.04 1618.96,4042.5 1872.5,4042.5 1872.5,3757.5 1742.5,3757.5 1742.5,3637.5 1448.96,3637.5 1337.5,3748.96
GND on Top "Top-GND 9" (solid, remove dead copper, pour order 22): 1855,3635 2215,3635 2215,3275 1855,3275
GND on Top "Top-GND 10" (solid, remove dead copper, pour order 24): 1552.5,2687.5 1247.5,2687.5 1247.5,3302.5 1361.04,3302.5 1462.5,3201.04 1462.5,3051.04 1552.5,2961.04
GND on Top "Top-GND 11" (solid, remove dead copper, pour order 26): 1247.5,2592.5 1552.5,2592.5 1552.5,2257.5 1247.5,2257.5
GND on Top "Top-GND 12" (solid, remove dead copper, pour order 28): 3175.18,4201 3595,4201 3595,4267 3795,4267 3795,4276 4165,4276 4165,4421 3624,4421 3624,4667 2604,4667 2604,4164.95 3090,4170 3113.18,4170
VBUS on Top "Top-VBUS" (solid, remove dead copper, pour order 30): 3855,4206 3855,4126 4037.9,4126 4095,4067.95 4095,3857.93 4277.93,3675 4435,3675 4435,3812.07 4422.07,3825 4252.07,3825 4175,3902.07 4175,4072.06 4042.08,4206

## Keep-outs
Keep-Out Layer:
  lines w0: 1000,1119 ccw(c1119,1119) 1119,1000 3796,1000 3796,1158 cw(c3875,1158) 3875,1237 4583,1237 ccw(c4583,1355) 4701,1355 4701,4583 ccw(c4583,4583) 4583,4701 1906,4701 1906,4544 cw(c1827,4544) 1827,4465 1119,4465 ccw(c1118.5,4346.5) 1000,4347 1000,1119

## Other copper
Bottom:
  pour cut-out net N$63: 1000,1000 1010,1000 1010,1010 1000,1010
  pour cut-out net N$63: 1000,1000 1010,1000 1010,1010 1000,1010
  pour cut-out net N$63: 1000,1000 1010,1000 1010,1010 1000,1010
  pour cut-out net N$63: 1000,1000 1010,1000 1010,1010 1000,1010

## Silkscreen, mask and mechanical layers (free items; w line width, h text height)
Dimension:
  lines w0: 1000,1119 ccw(c1119,1119) 1119,1000 3796,1000 3796,1158 cw(c3875,1158) 3875,1237 4583,1237 ccw(c4583,1355) 4701,1355 4701,4583 ccw(c4583,4583) 4583,4701 1906,4701 1906,4544 cw(c1827,4544) 1827,4465 1119,4465 ccw(c1118.5,4346.5) 1000,4347 1000,1119
Document:
  circle w16: c1827,3638 r5
  circle w16: c1434,3820 r5
  circle w16: c1281,3417 r5
  circle w16: c1842,2738 r5
  circle w16: c2698,3023 r5
  circle w16: c3545,3122 r5
  circle w16: c3545,3515 r5
  circle w16: c3545,3870 r5
  circle w16: c3899,2275 r5
  circle w16: c3092,3668 r5
  circle w16: c3092,3353 r5
  circle w16: c3845,4096 r5
  circle w16: c2979,1340 r5
  circle w16: c2743,1340 r5
  circle w16: c2428,1419 r5
  circle w16: c2152,1493 r5
  text "A" at 2787,4623 h34
  text "B" at 2885,4623 h34
  text "LED" at 2462,4391 h34 r90
  text "GND" at 2561,4391 h34 r90
  text "SDA" at 2295,2359 h34 r90
  text "SCL" at 2383,2359 h34 r90
  text "GND" at 2487,2359 h34 r90

## Text inside footprints (layer, text, board x,y; h text height)
C1: tValues ">VALUE" at 3831,3044 h77.5 r180; tNames ">NAME" at 3831,2929 h77.5 r180
C2: tValues ">VALUE" at 3831,3138 h77.5 r180; tNames ">NAME" at 3831,3023 h77.5 r180
C3: tValues ">VALUE" at 3831,3325 h77.5 r180; tNames ">NAME" at 3831,3210 h77.5 r180
C4: bValues ">VALUE" at 3397,3128 h77.5 r180; bNames ">NAME" at 3397,3013 h77.5 r180
C5: tValues ">VALUE" at 3831,3231 h77.5 r180; tNames ">NAME" at 3831,3116 h77.5 r180
C6: tValues ">VALUE" at 3831,3403 h77.5 r180; tNames ">NAME" at 3831,3288 h77.5 r180
C7: tValues ">VALUE" at 3831,3482 h77.5 r180; tNames ">NAME" at 3831,3367 h77.5 r180
C8: tValues ">VALUE" at 3831,3561 h77.5 r180; tNames ">NAME" at 3831,3446 h77.5 r180
C9: bValues ">VALUE" at 2777,3453 h77.5 r270; bNames ">NAME" at 2892,3453 h77.5 r270
C10: tValues ">VALUE" at 3831,3640 h77.5 r180; tNames ">NAME" at 3831,3525 h77.5 r180
C11: bValues ">VALUE" at 3394,3519 h77.5 r180; bNames ">NAME" at 3394,3404 h77.5 r180
C12: tValues ">VALUE" at 2658,3484 h77.5; tNames ">NAME" at 2658,3599 h77.5
C13: tValues ">VALUE" at 1509,3776 h77.5 r270; tNames ">NAME" at 1624,3776 h77.5 r270
C14: tValues ">VALUE" at 1510,3735 h77.5 r180; tNames ">NAME" at 1510,3620 h77.5 r180
C15: bValues ">VALUE" at 2793,3783 h77.5 r270; bNames ">NAME" at 2908,3783 h77.5 r270
C16: bValues ">VALUE" at 3380,3882 h77.5 r180; bNames ">NAME" at 3380,3767 h77.5 r180
C17: tValues ">VALUE" at 2747,3736 h77.5; tNames ">NAME" at 2747,3851 h77.5
C18: bValues ">VALUE" at 3098,1588 h77.5 r180; bNames ">NAME" at 3098,1473 h77.5 r180
C19: tValues ">VALUE" at 2328,1547 h77.5 r270; tNames ">NAME" at 2443,1547 h77.5 r270
C20: tValues ">VALUE" at 2571,2901 h77.5 r90; tNames ">NAME" at 2441,2901 h77.5 r90
C21: tValues ">VALUE" at 3035,2657 h77.5 r270; tNames ">NAME" at 3150,2657 h77.5 r270
C22: tValues ">VALUE" at 3035,2858 h77.5 r270; tNames ">NAME" at 3165,2858 h77.5 r270
C23: tValues ">VALUE" at 2482,2972 h77.5 r270; tNames ">NAME" at 2612,2972 h77.5 r270
C24: tValues ">VALUE" at 2643,1547 h77.5 r270; tNames ">NAME" at 2758,1547 h77.5 r270
C25: tValues ">VALUE" at 2275,1541 h77.5; tNames ">NAME" at 2275,1656 h77.5
C26: bValues ">VALUE" at 2910,4290 h77.5 r270; bNames ">NAME" at 3025,4290 h77.5 r270
C27: bValues ">VALUE" at 3246,4539 h77.5 r90; bNames ">NAME" at 3131,4539 h77.5 r90
C28: tValues ">VALUE" at 3870,2184 h77.5 r180; tNames ">NAME" at 3870,2069 h77.5 r180
C29: bValues ">VALUE" at 3553,4683 h77.5 r180; bNames ">NAME" at 3553,4533 h77.5 r180
C30: bValues ">VALUE" at 3488,4590 h77.5 r90; bNames ">NAME" at 3288,4590 h77.5 r90
C31: tValues ">VALUE" at 1568,3477 h77.5 r180; tNames ">NAME" at 1568,3362 h77.5 r180
C32: tValues ">VALUE" at 1568,3575 h77.5 r180; tNames ">NAME" at 1568,3460 h77.5 r180
C33: bValues ">VALUE" at 2065,3481 h77.5 r90; bNames ">NAME" at 1950,3481 h77.5 r90
C34: tValues ">VALUE" at 1768,3734 h77.5 r180; tNames ">NAME" at 1768,3619 h77.5 r180
C35: tValues ">VALUE" at 1349,3637 h77.5 r180; tNames ">NAME" at 1349,3522 h77.5 r180
C36: tValues ">VALUE" at 1379,3696 h77.5 r180; tNames ">NAME" at 1379,3581 h77.5 r180
C37: tValues ">VALUE" at 1912,3726 h77.5 r90; tNames ">NAME" at 1797,3726 h77.5 r90
C38: tValues ">VALUE" at 4191,4233 h77.5 r90; tNames ">NAME" at 4076,4233 h77.5 r90
C39: tValues ">VALUE" at 3684,4184 h77.5 r90; tNames ">NAME" at 3569,4184 h77.5 r90
C40: tValues ">VALUE" at 3600,4075 h77.5 r90; tNames ">NAME" at 3470,4075 h77.5 r90; Top Overlay "+" at 3535,4060 h77.5 r90
C41: tValues ">VALUE" at 3340,4070 h77.5 r90; tNames ">NAME" at 3210,4070 h77.5 r90; Top Overlay "+" at 3275,4055 h77.5 r90
D1: tValues ">VALUE" at 2746,2415 h77.5; tNames ">NAME" at 2746,2565 h77.5
F1: tValues ">VALUE" at 3035,4334 h77.5; tNames ">NAME" at 3035,4409 h77.5
JP1: tValues ">VALUE" at 2587,4669 h77.5 r180; tNames ">NAME" at 2587,4489 h77.5 r180
L1: tValues ">VALUE" at 2313.52,2838.11 h77.5 r270; tNames ">NAME" at 2590,2838.11 h77.5 r270
LED1: tValues ">VALUE" at 1498,3307 h24.8 r180; tNames ">NAME" at 1493,3236.5 h24.8 r180
Q1: tValues ">VALUE" at 1716,3546 h108.5 r270; tNames ">NAME" at 1791,3546 h108.5 r270
R1: tValues ">VALUE" at 3918,2884 h77.5; tNames ">NAME" at 3918,2999 h77.5
R2: tValues ">VALUE" at 3918,2978 h77.5; tNames ">NAME" at 3918,3093 h77.5
R3: tValues ">VALUE" at 3918,3165 h77.5; tNames ">NAME" at 3918,3280 h77.5
R4: tValues ">VALUE" at 3919,3071 h77.5; tNames ">NAME" at 3919,3186 h77.5
R5: tValues ">VALUE" at 3918,3243 h77.5; tNames ">NAME" at 3918,3358 h77.5
R6: tValues ">VALUE" at 3918,3322 h77.5; tNames ">NAME" at 3918,3437 h77.5
R7: tValues ">VALUE" at 3918,3401 h77.5; tNames ">NAME" at 3918,3516 h77.5
R8: tValues ">VALUE" at 3918,3480 h77.5; tNames ">NAME" at 3918,3595 h77.5
R9: tValues ">VALUE" at 2658,3553 h77.5; tNames ">NAME" at 2658,3668 h77.5
R10: tValues ">VALUE" at 3761,3597 h77.5; tNames ">NAME" at 3761,3712 h77.5
R11: tValues ">VALUE" at 3918,3597 h77.5; tNames ">NAME" at 3918,3712 h77.5
R12: tValues ">VALUE" at 3761,3676 h77.5; tNames ">NAME" at 3761,3791 h77.5
R13: tValues ">VALUE" at 3918,3676 h77.5; tNames ">NAME" at 3918,3791 h77.5
R14: tValues ">VALUE" at 3761,3755 h77.5; tNames ">NAME" at 3761,3870 h77.5
R15: tValues ">VALUE" at 3918,3755 h77.5; tNames ">NAME" at 3918,3870 h77.5
R16: tValues ">VALUE" at 3761,3833 h77.5; tNames ">NAME" at 3761,3948 h77.5
R17: tValues ">VALUE" at 3918,3833 h77.5; tNames ">NAME" at 3918,3948 h77.5
R18: tValues ">VALUE" at 2747,3805 h77.5; tNames ">NAME" at 2747,3920 h77.5
R19: tValues ">VALUE" at 2997,1862 h77.5 r270; tNames ">NAME" at 3112,1862 h77.5 r270
R20: tValues ">VALUE" at 3133,1317 h77.5 r180; tNames ">NAME" at 3133,1202 h77.5 r180
R21: tValues ">VALUE" at 2938,1862 h77.5 r270; tNames ">NAME" at 3053,1862 h77.5 r270
R22: bValues ">VALUE" at 4185,2934 h77.5; bNames ">NAME" at 4185,3049 h77.5
R23: bValues ">VALUE" at 4185,2988 h77.5; bNames ">NAME" at 4185,3103 h77.5
R24: tValues ">VALUE" at 2554,1784 h77.5 r270; tNames ">NAME" at 2669,1784 h77.5 r270
R25: tValues ">VALUE" at 2495,1784 h77.5 r270; tNames ">NAME" at 2610,1784 h77.5 r270
R26: bValues ">VALUE" at 4185,2771 h77.5; bNames ">NAME" at 4185,2886 h77.5
R27: tValues ">VALUE" at 2778,1216 h77.5 r90; tNames ">NAME" at 2663,1216 h77.5 r90
R28: bValues ">VALUE" at 4185,2825 h77.5; bNames ">NAME" at 4185,2940 h77.5
R29: bValues ">VALUE" at 4185,2880 h77.5; bNames ">NAME" at 4185,2995 h77.5
R30: tValues ">VALUE" at 2860,1784 h77.5 r270; tNames ">NAME" at 2975,1784 h77.5 r270
R31: tValues ">VALUE" at 2797,1784 h77.5 r270; tNames ">NAME" at 2912,1784 h77.5 r270
R32: tValues ">VALUE" at 2007,3011 h77.5 r90; tNames ">NAME" at 1892,3011 h77.5 r90
R33: tValues ">VALUE" at 2259,1547 h77.5 r270; tNames ">NAME" at 2374,1547 h77.5 r270
R34: tValues ">VALUE" at 1846,2943 h77.5 r270; tNames ">NAME" at 1961,2943 h77.5 r270
R35: bValues ">VALUE" at 2747,4073 h77.5 r180; bNames ">NAME" at 2747,3958 h77.5 r180
R36: bValues ">VALUE" at 2619,4191 h77.5 r180; bNames ">NAME" at 2619,4076 h77.5 r180
R37: bValues ">VALUE" at 2886,4346 h77.5; bNames ">NAME" at 2886,4461 h77.5
R38: tValues ">VALUE" at 2122,1705 h77.5 r270; tNames ">NAME" at 2237,1705 h77.5 r270
R39: bValues ">VALUE" at 2619,4269 h77.5 r180; bNames ">NAME" at 2619,4154 h77.5 r180
R40: bValues ">VALUE" at 2885,4073 h77.5 r180; bNames ">NAME" at 2885,3958 h77.5 r180
R41: tValues ">VALUE" at 2062,1777 h77.5 r270; tNames ">NAME" at 2177,1777 h77.5 r270
R42: tValues ">VALUE" at 2065,3011 h77.5 r90; tNames ">NAME" at 1950,3011 h77.5 r90
R43: tValues ">VALUE" at 1905,2943 h77.5 r270; tNames ">NAME" at 2020,2943 h77.5 r270
R44: tValues ">VALUE" at 2124,3012 h77.5 r90; tNames ">NAME" at 2009,3012 h77.5 r90
R45: tValues ">VALUE" at 3147,4560 h77.5 r180; tNames ">NAME" at 3147,4445 h77.5 r180
R46: tValues ">VALUE" at 1965,2944 h77.5 r270; tNames ">NAME" at 2080,2944 h77.5 r270
R47: tValues ">VALUE" at 3260,4560 h77.5 r180; tNames ">NAME" at 3260,4445 h77.5 r180
R48: tValues ">VALUE" at 3751,2224 h77.5 r270; tNames ">NAME" at 3866,2224 h77.5 r270
R49: tValues ">VALUE" at 3309,4466 h77.5 r270; tNames ">NAME" at 3424,4466 h77.5 r270
R50: tValues ">VALUE" at 1596,3091 h77.5 r90; tNames ">NAME" at 1481,3091 h77.5 r90
R51: tValues ">VALUE" at 1655,3091 h77.5 r90; tNames ">NAME" at 1540,3091 h77.5 r90
R52: tValues ">VALUE" at 1714,3091 h77.5 r90; tNames ">NAME" at 1599,3091 h77.5 r90
R53: tValues ">VALUE" at 1772,3013 h77.5 r90; tNames ">NAME" at 1657,3013 h77.5 r90
R54: bValues ">VALUE" at 3718,2374 h77.5 r90; bNames ">NAME" at 3603,2374 h77.5 r90
R55: tValues ">VALUE" at 1831,3013 h77.5 r90; tNames ">NAME" at 1716,3013 h77.5 r90
R56: tValues ">VALUE" at 1888,3013 h77.5 r90; tNames ">NAME" at 1773,3013 h77.5 r90
R57: tValues ">VALUE" at 1947,3013 h77.5 r90; tNames ">NAME" at 1832,3013 h77.5 r90
R58: tValues ">VALUE" at 2677,1784 h77.5 r270; tNames ">NAME" at 2792,1784 h77.5 r270
R59: bValues ">VALUE" at 3870,2565 h77.5 r90; bNames ">NAME" at 3755,2565 h77.5 r90
R60: bValues ">VALUE" at 3930,2515 h77.5 r90; bNames ">NAME" at 3815,2515 h77.5 r90
R61: tValues ">VALUE" at 2620,1784 h77.5 r270; tNames ">NAME" at 2735,1784 h77.5 r270
R62: tValues ">VALUE" at 1933,2577 h77.5 r90; tNames ">NAME" at 1818,2577 h77.5 r90
R63: tValues ">VALUE" at 2411,2253 h77.5 r90; tNames ">NAME" at 2296,2253 h77.5 r90
R64: tValues ">VALUE" at 2477,2253 h77.5 r90; tNames ">NAME" at 2362,2253 h77.5 r90
R65: tValues ">VALUE" at 2348,2253 h77.5 r90; tNames ">NAME" at 2233,2253 h77.5 r90
R66: bValues ">VALUE" at 1871,3640 h77.5 r180; bNames ">NAME" at 1871,3525 h77.5 r180
R67: tValues ">VALUE" at 2545,2253 h77.5 r90; tNames ">NAME" at 2430,2253 h77.5 r90
R68: tValues ">VALUE" at 1534,3185 h77.5; tNames ">NAME" at 1534,3300 h77.5
R69: bValues ">VALUE" at 4186,3044 h77.5; bNames ">NAME" at 4186,3159 h77.5
R70: bValues ">VALUE" at 4185,3098 h77.5; bNames ">NAME" at 4185,3213 h77.5
R71: tValues ">VALUE" at 2044,4326 h77.5 r270; tNames ">NAME" at 2159,4326 h77.5 r270
R72: tValues ">VALUE" at 2230,3652 h77.5; tNames ">NAME" at 2230,3767 h77.5
R73: tValues ">VALUE" at 2348,3617 h77.5; tNames ">NAME" at 2348,3732 h77.5
R74: tValues ">VALUE" at 3633,4266 h77.5; tNames ">NAME" at 3633,4381 h77.5
R75: tValues ">VALUE" at 3186,4309 h77.5 r180; tNames ">NAME" at 3186,4194 h77.5 r180
R76: tValues ">VALUE" at 3952,4303 h77.5 r270; tNames ">NAME" at 4067,4303 h77.5 r270
R77: tValues ">VALUE" at 2010,3879 h77.5 r90; tNames ">NAME" at 1895,3879 h77.5 r90
TR1: tValues ">VALUE" at 3085,4461 h77.5 r270; tNames ">NAME" at 3285,4461 h77.5 r270
U1: tValues ">VALUE" at 3282,3148 h77.5 r270; tNames ">NAME" at 3532,3148 h77.5 r270
U2: tValues ">VALUE" at 3171,3654 h77.5 r180; tNames ">NAME" at 3171,3354 h77.5 r180
U3: tValues ">VALUE" at 3279,3542 h77.5 r270; tNames ">NAME" at 3529,3542 h77.5 r270
U4: tValues ">VALUE" at 1356.89,3629 h77.5; tNames ">NAME" at 1356.89,3826.74 h77.5
U5: tValues ">VALUE" at 3173,3971 h77.5 r180; tNames ">NAME" at 3173,3671 h77.5 r180
U6: tValues ">VALUE" at 3274,3897 h77.5 r270; tNames ">NAME" at 3524,3897 h77.5 r270
U7: tValues ">VALUE" at 3057,1480 h77.5; tNames ">NAME" at 2977,1370 h77.5 r90
U8: tValues ">VALUE" at 2731,1410 h77.5 r90; tNames ">NAME" at 2431,1410 h77.5 r90
U9: tValues ">VALUE" at 2668.36,1128 h77.5; tNames ">NAME" at 2678.2,1334.74 h77.5
U10: tValues ">VALUE" at 2826,2947 h77.5 r270; tNames ">NAME" at 2726,2997 h77.5
U11: tValues ">VALUE" at 3019,1422.5 h77.5 r90; tNames ">NAME" at 2731,1435 h77.5 r90
U12: tValues ">VALUE" at 2163,1375 h77.5; tNames ">NAME" at 2163,1585 h77.5
U13: bValues ">VALUE" at 2688,4112.5 h77.5 r270; bNames ">NAME" at 2976,4125 h77.5 r270
U14: tValues ">VALUE" at 3921.57,2659 h77.5 r180; tNames ">NAME" at 3921.57,2274.66 h77.5 r180
U15: tValues ">VALUE" at 1442,2732.57 h77.5 r270; tNames ">NAME" at 1826.34,2732.57 h77.5 r270
U16: tValues ">VALUE" at 3301.36,4417 h77.5; tNames ">NAME" at 3311.2,4623.74 h77.5
U17: tValues ">VALUE" at 1892.63,3337.86 h77.5; tNames ">NAME" at 1907.79,3515 h77.5
U18: tValues ">VALUE" at 1480,3366 h77.5 r90; tNames ">NAME" at 1280,3366 h77.5 r90
U19: tValues ">VALUE" at 1673,3989 h77.5 r270; tNames ">NAME" at 1883,3989 h77.5 r270
U20: tValues ">VALUE" at 3887.5,4378 h77.5 r180; tNames ">NAME" at 3875,4090 h77.5 r180
U21: tValues ">VALUE" at 3262,4210 h77.5 r270; tNames ">NAME" at 3462,4210 h77.5 r270
X1: tValues ">VALUE" at 4172,4226 h108.5; tNames ">NAME" at 4172,4301 h108.5
X2: bValues ">VALUE" at 3201,4800 h108.5 r90; bNames ">NAME" at 2551,4800 h108.5 r90; Bottom Overlay "1" at 2676,4675 h77.5 r180
X3: tValues ">VALUE" at 2264,2376 h77.5; tNames ">NAME" at 2261,2573 h77.5
X4: tValues ">VALUE" at 2370,3226 h77.5 r180; tNames ">NAME" at 2370,3076 h77.5 r180
X5: tValues ">VALUE" at 2434,3315 h77.5 r180; tNames ">NAME" at 2434,3165 h77.5 r180
X6: tValues ">VALUE" at 2379,4700 h77.5 r180; tNames ">NAME" at 2379,4350 h77.5 r180